# EAGLE board I2C_Breakout_Block-GiantPanel-v10 (EAGLE 6.6.0), part 1 of 11
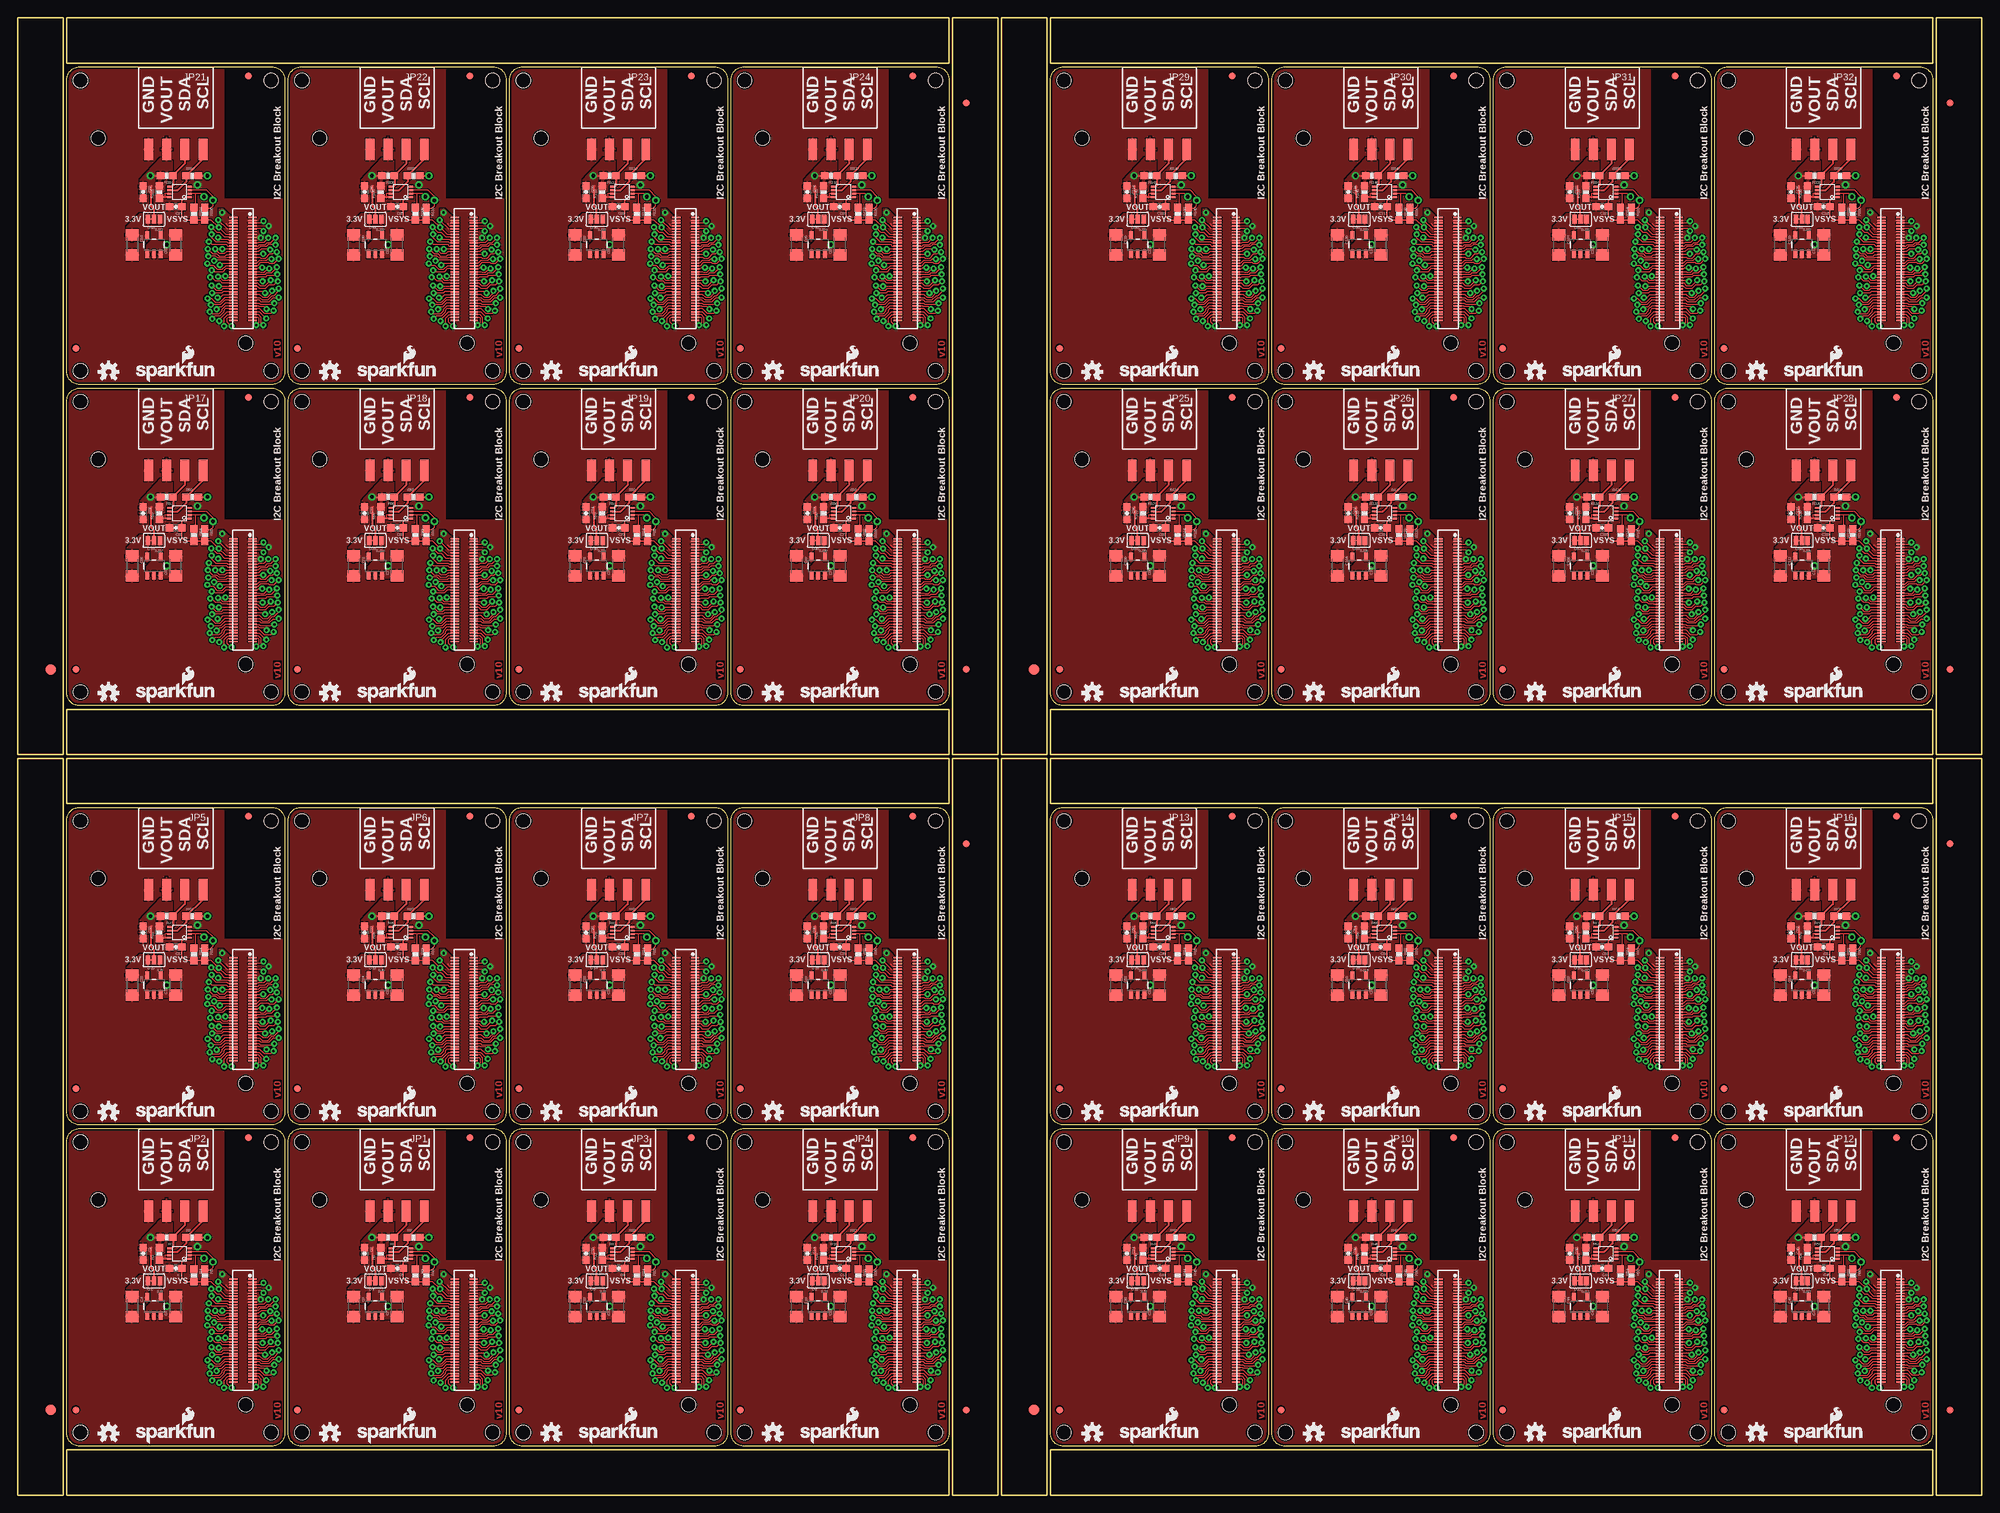
[diagram p0: board, top side]
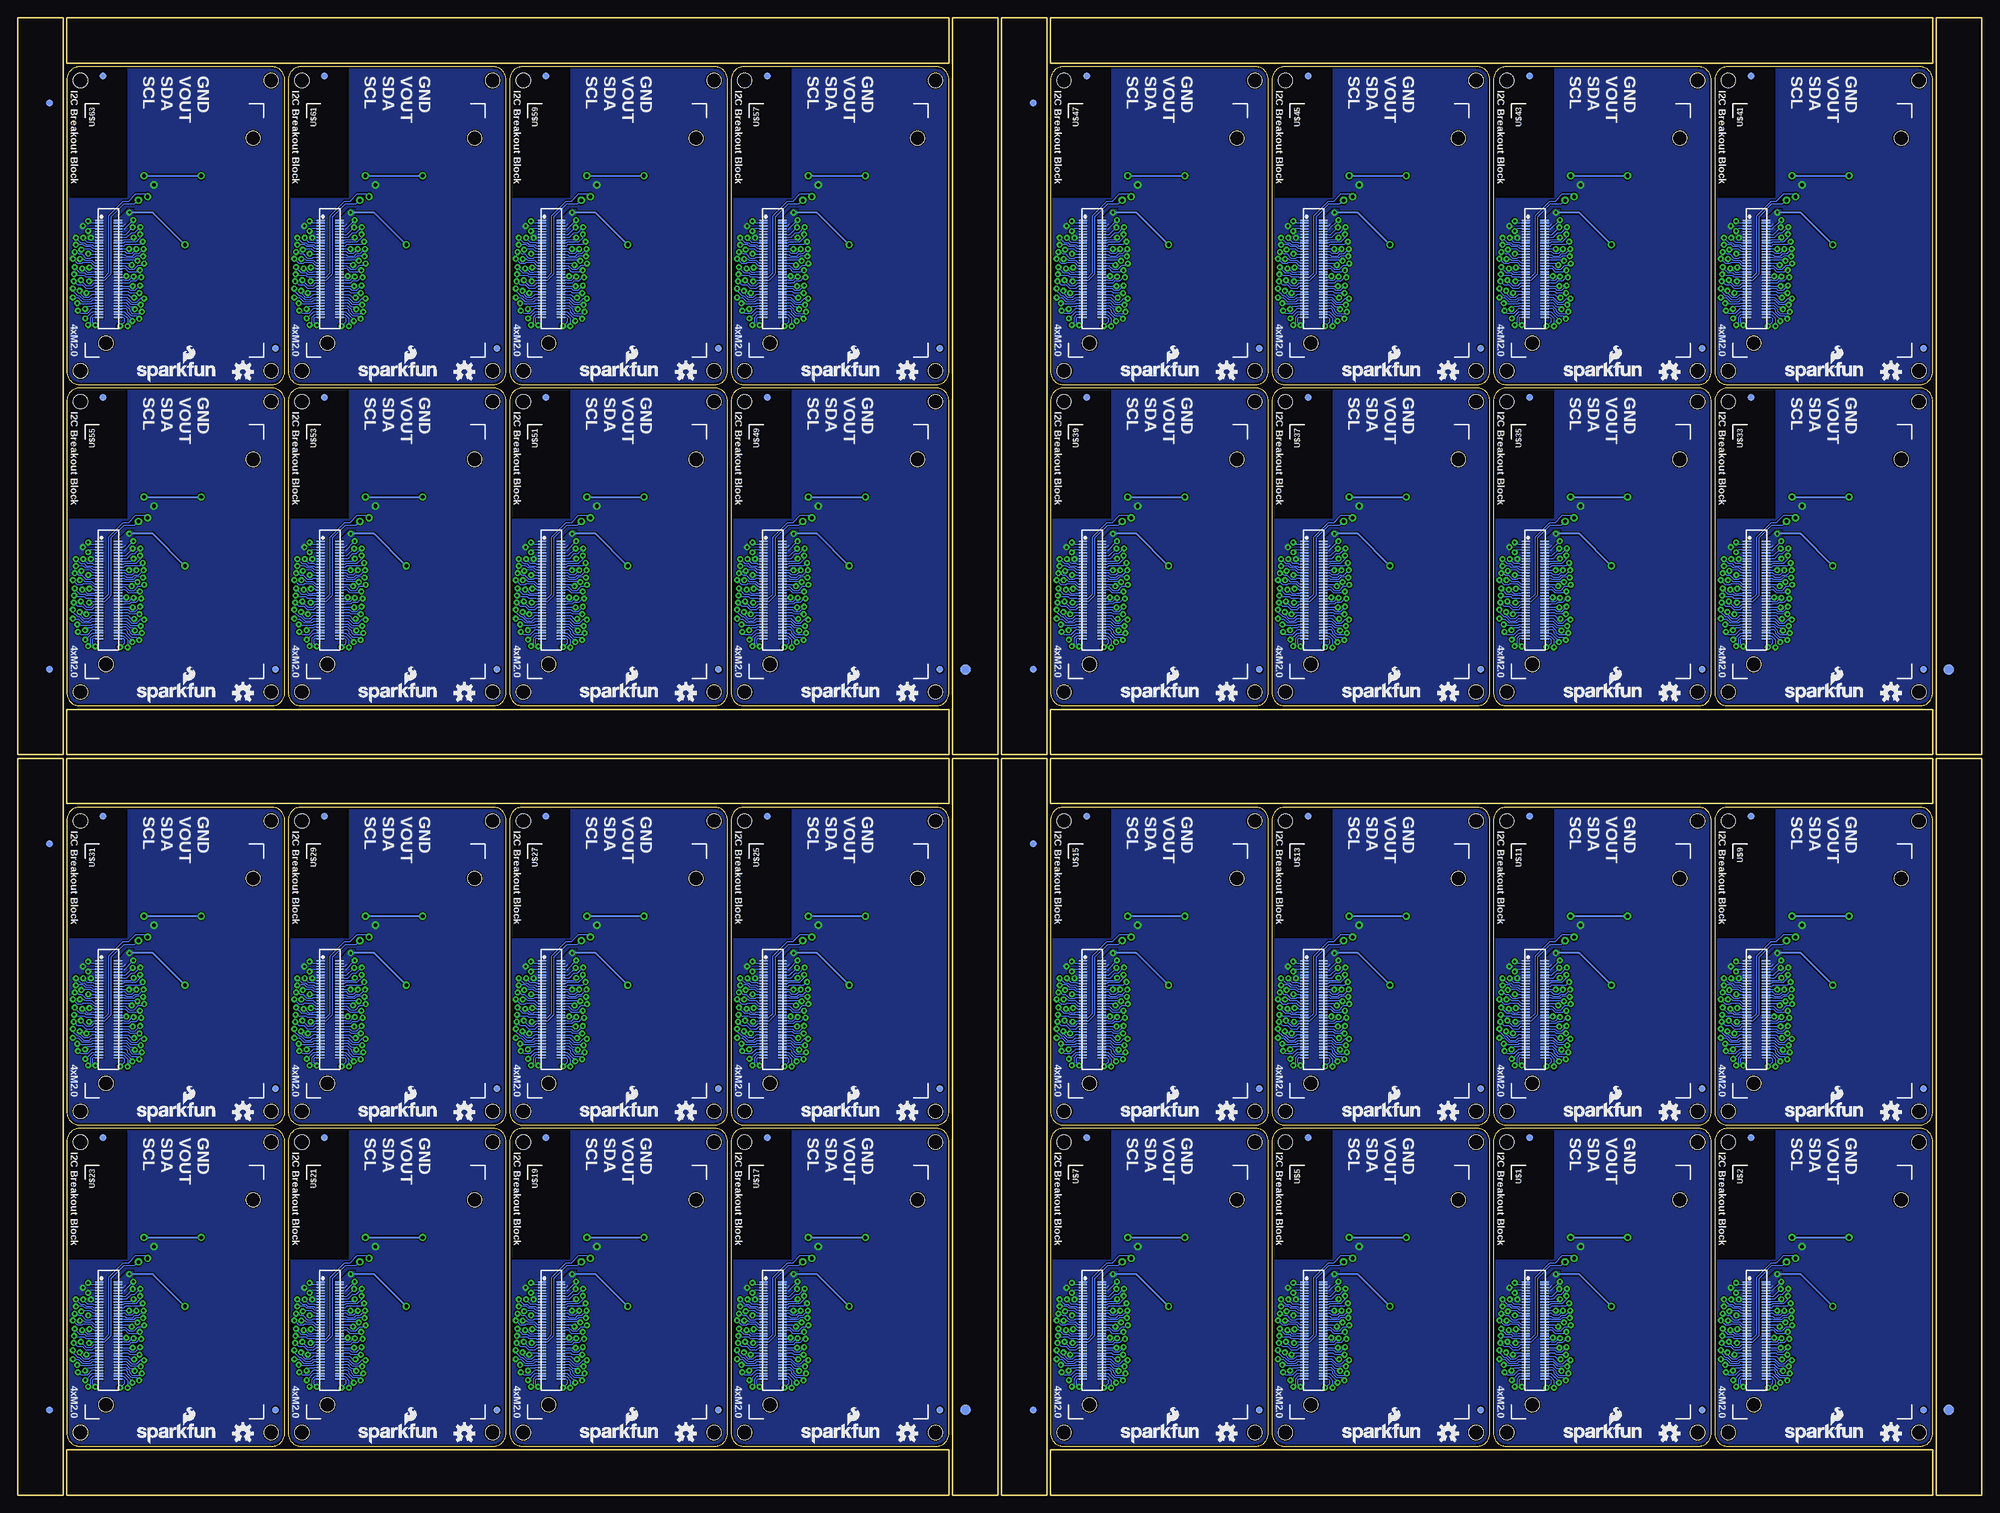
[diagram p1: board, bottom side, seen from below]

Size 274.83 x 206.76 mm. Coordinates in mm from the lower left corner, seen from the top.
Outline: 336 segments
Copper layers (1*16): Top 0.035mm / dielectric 1.5mm / Bottom 0.035mm
Design rules "SparkFun-2-layer *": minimum track width 6mil, minimum drill 13mil, track to track 6mil, track to pad 6mil, pad to pad 6mil, via to via 6mil, smd to smd 6mil, copper to edge 8mil, drill to drill 8mil, minimum pad ring 12mil, minimum via ring 10mil, stop-mask expansion 4mil, vias tented up to drill 20mil, thermal gap 6mil
Holes 2 mm at 35.43,8.76 8.76,8.76 8.76,49.4 35.43,49.4 66.42,8.76 39.75,8.76 39.75,49.4 66.42,49.4 97.41,8.76 70.74,8.76 70.74,49.4 97.41,49.4 128.4,8.76 101.73,8.76 101.73,49.4 128.4,49.4 35.43,53.72 8.76,53.72 8.76,94.36 35.43,94.36 66.42,53.72 39.75,53.72 39.75,94.36 66.42,94.36 97.41,53.72 70.74,53.72 70.74,94.36 97.41,94.36 128.4,53.72 101.73,53.72 101.73,94.36 128.4,94.36 173.1,8.76 146.43,8.76 146.43,49.4 173.1,49.4 204.09,8.76 177.42,8.76 177.42,49.4 204.09,49.4 235.08,8.76 208.41,8.76 208.41,49.4 235.08,49.4 266.06,8.76 239.4,8.76 239.4,49.4 266.06,49.4 173.1,53.72 146.43,53.72 146.43,94.36 173.1,94.36 204.09,53.72 177.42,53.72 177.42,94.36 204.09,94.36 235.08,53.72 208.41,53.72 208.41,94.36 235.08,94.36 266.06,53.72 239.4,53.72 239.4,94.36 266.06,94.36 35.43,112.39 8.76,112.39 8.76,153.03 35.43,153.03 66.42,112.39 39.75,112.39 39.75,153.03 66.42,153.03 97.41,112.39 70.74,112.39 70.74,153.03 97.41,153.03 128.4,112.39 101.73,112.39 101.73,153.03 128.4,153.03 35.43,157.35 8.76,157.35 8.76,197.99 35.43,197.99 66.42,157.35 39.75,157.35 39.75,197.99 66.42,197.99 97.41,157.35 70.74,157.35 70.74,197.99 97.41,197.99 128.4,157.35 101.73,157.35 101.73,197.99 128.4,197.99 173.1,112.39 146.43,112.39 146.43,153.03 173.1,153.03 204.09,112.39 177.42,112.39 177.42,153.03 204.09,153.03 235.08,112.39 208.41,112.39 208.41,153.03 235.08,153.03 266.06,112.39 239.4,112.39 239.4,153.03 266.06,153.03 173.1,157.35 146.43,157.35 146.43,197.99 173.1,197.99 204.09,157.35 177.42,157.35 177.42,197.99 204.09,197.99 235.08,157.35 208.41,157.35 208.41,197.99 235.08,197.99 266.06,157.35 239.4,157.35 239.4,197.99 266.06,197.99
tRestrict: area 29,33 to 37.3,51.3; area 59.9,33 to 68.3,51.3; area 90.9,33 to 99.3,51.3; area 121.9,33 to 130.3,51.3; area 29,78 to 37.3,96.3; area 59.9,78 to 68.3,96.3; area 90.9,78 to 99.3,96.3; area 121.9,78 to 130.3,96.3; area 166.6,33 to 175,51.3; area 197.6,33 to 206,51.3; area 228.6,33 to 237,51.3; area 259.6,33 to 268,51.3; 20 more areas; 32 lines
bRestrict: area 29,33 to 37.3,51.3; area 59.9,33 to 68.3,51.3; area 90.9,33 to 99.3,51.3; area 121.9,33 to 130.3,51.3; area 29,78 to 37.3,96.3; area 59.9,78 to 68.3,96.3; area 90.9,78 to 99.3,96.3; area 121.9,78 to 130.3,96.3; area 166.6,33 to 175,51.3; area 197.6,33 to 206,51.3; area 228.6,33 to 237,51.3; area 259.6,33 to 268,51.3; 20 more areas

## Footprints (pad centres in the part's own frame; a part is rotated, then mirrored left to right if it is on the bottom)
0603-CAP = smd 1.1 x 1: 1 -0.85,0; 2 0.85,0
1206 = smd 1.6 x 1.8: 1 -1.4,0; 2 1.4,0
FIDUCIAL-1.5X3 = smd 1.5 x 1.5: 1 0,0
FIDUCIAL-1X2 = smd 1 x 1: 1 0,0
1X04_SMD_RA_FEMALE = smd 1.25 x 3: 1 -3.81,7.225; 2 -1.27,7.225; 3 1.27,7.225; 4 3.81,7.225
0603-RES = smd 1.1 x 1: 1 -0.85,0; 2 0.85,0
PAD-JUMPER-3-2OF3_NC_BY_TRACE_YES_SILK_FULL_BOX = smd 0.635 x 1.27: 1 -0.813,0; 2 0,0; 3 0.813,0
SOT23-5 = smd 0.55 x 1.2: 1 -0.95,-1.3; 2 0,-1.3; 3 0.95,-1.3; 4 0.95,1.3; 5 -0.95,1.3
PCA9306DC-1:1 = smd 0.25 x 0.602: 1 -0.73,-1.446; 2 -0.23,-1.446; 3 0.27,-1.446; 4 0.77,-1.446; 5 0.77,1.431; 6 0.27,1.431; 7 -0.23,1.431; 8 -0.73,1.431
EDISON_DAUGHTER = smd 1.14 x 0.2: 1 1.98,19.17; 2 4.62,19.17; 3 1.98,18.77; 4 4.62,18.77; 5 1.98,18.37; 6 4.62,18.37; 7 1.98,17.97; 8 4.62,17.97; 9 1.98,17.57; 10 4.62,17.57; 11 1.98,17.17; 12 4.62,17.17; 13 1.98,16.77; 14 4.62,16.77; 15 1.98,16.37; 16 4.62,16.37; 17 1.98,15.97; 18 4.62,15.97; 19 1.98,15.57; 20 4.62,15.57; 21 1.98,15.17; 22 4.62,15.17; 23 1.98,14.77; 24 4.62,14.77; 25 1.98,14.37; 26 4.62,14.37; 27 1.98,13.97; 28 4.62,13.97; 29 1.98,13.57; 30 4.62,13.57; 31 1.98,13.17; 32 4.62,13.17; 33 1.98,12.77; 34 4.62,12.77; 35 1.98,12.37; 36 4.62,12.37; 37 1.98,11.97; 38 4.62,11.97; 39 1.98,11.57; 40 4.62,11.57; 41 1.98,11.17; 42 4.62,11.17; 43 1.98,10.77; 44 4.62,10.77; 45 1.98,10.37; 46 4.62,10.37; 47 1.98,9.97; 48 4.62,9.97; 49 1.98,9.57; 50 4.62,9.57; 51 1.98,9.17; 52 4.62,9.17; 53 1.98,8.77; 54 4.62,8.77; 55 1.98,8.37; 56 4.62,8.37; 57 1.98,7.97; 58 4.62,7.97; 59 1.98,7.57; 60 4.62,7.57; 61 1.98,7.17; 62 4.62,7.17; 63 1.98,6.77; 64 4.62,6.77; 65 1.98,6.37; 66 4.62,6.37; 67 1.98,5.97; 68 4.62,5.97; 69 1.98,5.57; 70 4.62,5.57 | hole 2: 23.53,30.67; 2.93,1.98
DF40C-70DP-0.4(51) = smd 0.2 x 1.14 bottom: 1 6.8,1.32; 2 6.8,-1.32; 3 6.4,1.32; 4 6.4,-1.32; 5 6,1.32; 6 6,-1.32; 7 5.6,1.32; 8 5.6,-1.32; 9 5.2,1.32; 10 5.2,-1.32; 11 4.8,1.32; 12 4.8,-1.32; 13 4.4,1.32; 14 4.4,-1.32; 15 4,1.32; 16 4,-1.32; 17 3.6,1.32; 18 3.6,-1.32; 19 3.2,1.32; 20 3.2,-1.32; 21 2.8,1.32; 22 2.8,-1.32; 23 2.4,1.32; 24 2.4,-1.32; 25 2,1.32; 26 2,-1.32; 27 1.6,1.32; 28 1.6,-1.32; 29 1.2,1.32; 30 1.2,-1.32; 31 0.8,1.32; 32 0.8,-1.32; 33 0.4,1.32; 34 0.4,-1.32; 35 0,1.32; 36 0,-1.32; 37 -0.4,1.32; 38 -0.4,-1.32; 39 -0.8,1.32; 40 -0.8,-1.32; 41 -1.2,1.32; 42 -1.2,-1.32; 43 -1.6,1.32; 44 -1.6,-1.32; 45 -2,1.32; 46 -2,-1.32; 47 -2.4,1.32; 48 -2.4,-1.32; 49 -2.8,1.32; 50 -2.8,-1.32; 51 -3.2,1.32; 52 -3.2,-1.32; 53 -3.6,1.32; 54 -3.6,-1.32; 55 -4,1.32; 56 -4,-1.32; 57 -4.4,1.32; 58 -4.4,-1.32; 59 -4.8,1.32; 60 -4.8,-1.32; 61 -5.2,1.32; 62 -5.2,-1.32; 63 -5.6,1.32; 64 -5.6,-1.32; 65 -6,1.32; 66 -6,-1.32; 67 -6.4,1.32; 68 -6.4,-1.32; 69 -6.8,1.32; 70 -6.8,-1.32; NC1 7.2,1.32; NC2 7.2,-1.32; NC3 -7.2,-1.32; NC4 -7.2,1.32

## Placement (x,y rotation side)
C1  0.1uF  [0603-CAP]  22.1,31.75 180 top
C2  0.1uF  [0603-CAP]  17.53,33.78 270 top
C3  10uF  [1206]  22.1,26.42 90 top
C4  10uF  [1206]  16,26.42 270 top
C5  0.1uF  [0603-CAP]  53.09,31.75 180 top
C6  0.1uF  [0603-CAP]  48.51,33.78 270 top
C7  10uF  [1206]  53.09,26.42 90 top
C8  10uF  [1206]  46.99,26.42 270 top
C9  0.1uF  [0603-CAP]  84.07,31.75 180 top
C10  0.1uF  [0603-CAP]  79.5,33.78 270 top
C11  10uF  [1206]  84.07,26.42 90 top
C12  10uF  [1206]  77.98,26.42 270 top
C13  0.1uF  [0603-CAP]  115.06,31.75 180 top
C14  0.1uF  [0603-CAP]  110.49,33.78 270 top
C15  10uF  [1206]  115.06,26.42 90 top
C16  10uF  [1206]  108.97,26.42 270 top
C17  0.1uF  [0603-CAP]  22.1,76.71 180 top
C18  0.1uF  [0603-CAP]  17.53,78.74 270 top
C19  10uF  [1206]  22.1,71.37 90 top
C20  10uF  [1206]  16,71.37 270 top
C21  0.1uF  [0603-CAP]  53.09,76.71 180 top
C22  0.1uF  [0603-CAP]  48.51,78.74 270 top
C23  10uF  [1206]  53.09,71.37 90 top
C24  10uF  [1206]  46.99,71.37 270 top
C25  0.1uF  [0603-CAP]  84.07,76.71 180 top
C26  0.1uF  [0603-CAP]  79.5,78.74 270 top
C27  10uF  [1206]  84.07,71.37 90 top
C28  10uF  [1206]  77.98,71.37 270 top
C29  0.1uF  [0603-CAP]  115.06,76.71 180 top
C30  0.1uF  [0603-CAP]  110.49,78.74 270 top
C31  10uF  [1206]  115.06,71.37 90 top
C32  10uF  [1206]  108.97,71.37 270 top
C33  0.1uF  [0603-CAP]  159.77,31.75 180 top
C34  0.1uF  [0603-CAP]  155.19,33.78 270 top
C35  10uF  [1206]  159.77,26.42 90 top
C36  10uF  [1206]  153.67,26.42 270 top
C37  0.1uF  [0603-CAP]  190.75,31.75 180 top
C38  0.1uF  [0603-CAP]  186.18,33.78 270 top
C39  10uF  [1206]  190.75,26.42 90 top
C40  10uF  [1206]  184.66,26.42 270 top
C41  0.1uF  [0603-CAP]  221.74,31.75 180 top
C42  0.1uF  [0603-CAP]  217.17,33.78 270 top
C43  10uF  [1206]  221.74,26.42 90 top
C44  10uF  [1206]  215.65,26.42 270 top
C45  0.1uF  [0603-CAP]  252.73,31.75 180 top
C46  0.1uF  [0603-CAP]  248.16,33.78 270 top
C47  10uF  [1206]  252.73,26.42 90 top
C48  10uF  [1206]  246.63,26.42 270 top
C49  0.1uF  [0603-CAP]  159.77,76.71 180 top
C50  0.1uF  [0603-CAP]  155.19,78.74 270 top
C51  10uF  [1206]  159.77,71.37 90 top
C52  10uF  [1206]  153.67,71.37 270 top
C53  0.1uF  [0603-CAP]  190.75,76.71 180 top
C54  0.1uF  [0603-CAP]  186.18,78.74 270 top
C55  10uF  [1206]  190.75,71.37 90 top
C56  10uF  [1206]  184.66,71.37 270 top
C57  0.1uF  [0603-CAP]  221.74,76.71 180 top
C58  0.1uF  [0603-CAP]  217.17,78.74 270 top
C59  10uF  [1206]  221.74,71.37 90 top
C60  10uF  [1206]  215.65,71.37 270 top
C61  0.1uF  [0603-CAP]  252.73,76.71 180 top
C62  0.1uF  [0603-CAP]  248.16,78.74 270 top
C63  10uF  [1206]  252.73,71.37 90 top
C64  10uF  [1206]  246.63,71.37 270 top
C65  0.1uF  [0603-CAP]  22.1,135.38 180 top
C66  0.1uF  [0603-CAP]  17.53,137.41 270 top
C67  10uF  [1206]  22.1,130.05 90 top
C68  10uF  [1206]  16,130.05 270 top
C69  0.1uF  [0603-CAP]  53.09,135.38 180 top
C70  0.1uF  [0603-CAP]  48.51,137.41 270 top
C71  10uF  [1206]  53.09,130.05 90 top
C72  10uF  [1206]  46.99,130.05 270 top
C73  0.1uF  [0603-CAP]  84.07,135.38 180 top
C74  0.1uF  [0603-CAP]  79.5,137.41 270 top
C75  10uF  [1206]  84.07,130.05 90 top
C76  10uF  [1206]  77.98,130.05 270 top
C77  0.1uF  [0603-CAP]  115.06,135.38 180 top
C78  0.1uF  [0603-CAP]  110.49,137.41 270 top
C79  10uF  [1206]  115.06,130.05 90 top
C80  10uF  [1206]  108.97,130.05 270 top
C81  0.1uF  [0603-CAP]  22.1,180.34 180 top
C82  0.1uF  [0603-CAP]  17.53,182.37 270 top
C83  10uF  [1206]  22.1,175.01 90 top
C84  10uF  [1206]  16,175.01 270 top
C85  0.1uF  [0603-CAP]  53.09,180.34 180 top
C86  0.1uF  [0603-CAP]  48.51,182.37 270 top
C87  10uF  [1206]  53.09,175.01 90 top
C88  10uF  [1206]  46.99,175.01 270 top
C89  0.1uF  [0603-CAP]  84.07,180.34 180 top
C90  0.1uF  [0603-CAP]  79.5,182.37 270 top
C91  10uF  [1206]  84.07,175.01 90 top
C92  10uF  [1206]  77.98,175.01 270 top
C93  0.1uF  [0603-CAP]  115.06,180.34 180 top
C94  0.1uF  [0603-CAP]  110.49,182.37 270 top
C95  10uF  [1206]  115.06,175.01 90 top
C96  10uF  [1206]  108.97,175.01 270 top
C97  0.1uF  [0603-CAP]  159.77,135.38 180 top
C98  0.1uF  [0603-CAP]  155.19,137.41 270 top
C99  10uF  [1206]  159.77,130.05 90 top
C100  10uF  [1206]  153.67,130.05 270 top
C101  0.1uF  [0603-CAP]  190.75,135.38 180 top
C102  0.1uF  [0603-CAP]  186.18,137.41 270 top
C103  10uF  [1206]  190.75,130.05 90 top
C104  10uF  [1206]  184.66,130.05 270 top
C105  0.1uF  [0603-CAP]  221.74,135.38 180 top
C106  0.1uF  [0603-CAP]  217.17,137.41 270 top
C107  10uF  [1206]  221.74,130.05 90 top
C108  10uF  [1206]  215.65,130.05 270 top
C109  0.1uF  [0603-CAP]  252.73,135.38 180 top
C110  0.1uF  [0603-CAP]  248.16,137.41 270 top
C111  10uF  [1206]  252.73,130.05 90 top
C112  10uF  [1206]  246.63,130.05 270 top
C113  0.1uF  [0603-CAP]  159.77,180.34 180 top
C114  0.1uF  [0603-CAP]  155.19,182.37 270 top
C115  10uF  [1206]  159.77,175.01 90 top
C116  10uF  [1206]  153.67,175.01 270 top
C117  0.1uF  [0603-CAP]  190.75,180.34 180 top
C118  0.1uF  [0603-CAP]  186.18,182.37 270 top
C119  10uF  [1206]  190.75,175.01 90 top
C120  10uF  [1206]  184.66,175.01 270 top
C121  0.1uF  [0603-CAP]  221.74,180.34 180 top
C122  0.1uF  [0603-CAP]  217.17,182.37 270 top
C123  10uF  [1206]  221.74,175.01 90 top
C124  10uF  [1206]  215.65,175.01 270 top
C125  0.1uF  [0603-CAP]  252.73,180.34 180 top
C126  0.1uF  [0603-CAP]  248.16,182.37 270 top
C127  10uF  [1206]  252.73,175.01 90 top
C128  10uF  [1206]  246.63,175.01 270 top
E$1  [FIDUCIAL-1.5X3]  4.57,11.94 0 top
E$2  [FIDUCIAL-1.5X3]  4.57,11.94 0 bottom
E$3  [FIDUCIAL-1X2]  132.72,91.19 180 bottom
E$4  [FIDUCIAL-1X2]  132.72,11.94 0 top
E$5  [FIDUCIAL-1X2]  132.72,91.19 180 top
E$6  [FIDUCIAL-1X2]  132.72,11.94 0 bottom
E$7  [FIDUCIAL-1X2]  270.38,11.94 0 top
E$8  [FIDUCIAL-1X2]  270.38,91.19 180 top
E$9  [FIDUCIAL-1.5X3]  142.24,11.94 0 top
E$10  [FIDUCIAL-1.5X3]  142.24,11.94 0 bottom
E$11  [FIDUCIAL-1X2]  270.38,91.19 180 bottom
E$12  [FIDUCIAL-1X2]  270.38,11.94 0 bottom
E$13  [FIDUCIAL-1X2]  132.72,115.57 0 top
E$14  [FIDUCIAL-1X2]  132.72,194.82 180 top
E$15  [FIDUCIAL-1.5X3]  4.57,115.57 0 top
E$16  [FIDUCIAL-1.5X3]  4.57,115.57 0 bottom
E$17  [FIDUCIAL-1X2]  132.72,194.82 180 bottom
E$18  [FIDUCIAL-1X2]  132.72,115.57 0 bottom
E$19  [FIDUCIAL-1X2]  270.38,115.57 0 top
E$20  [FIDUCIAL-1X2]  270.38,194.82 180 top
E$21  [FIDUCIAL-1.5X3]  142.24,115.57 0 top
E$22  [FIDUCIAL-1.5X3]  142.24,115.57 0 bottom
E$23  [FIDUCIAL-1X2]  270.38,194.82 180 bottom
E$24  [FIDUCIAL-1X2]  270.38,115.57 0 bottom
FID1  FIDUCIAL1X2  [FIDUCIAL-1X2]  32.26,50.04 0 bottom
FID2  FIDUCIAL1X2  [FIDUCIAL-1X2]  32.26,50.04 0 top
FID3  FIDUCIAL1X2  [FIDUCIAL-1X2]  8.13,11.94 0 bottom
FID4  FIDUCIAL1X2  [FIDUCIAL-1X2]  8.13,11.94 0 top
FID5  FIDUCIAL1X2  [FIDUCIAL-1X2]  63.25,50.04 0 bottom
FID6  FIDUCIAL1X2  [FIDUCIAL-1X2]  63.25,50.04 0 top
FID7  FIDUCIAL1X2  [FIDUCIAL-1X2]  39.12,11.94 0 bottom
FID8  FIDUCIAL1X2  [FIDUCIAL-1X2]  39.12,11.94 0 top
FID9  FIDUCIAL1X2  [FIDUCIAL-1X2]  94.23,50.04 0 bottom
FID10  FIDUCIAL1X2  [FIDUCIAL-1X2]  94.23,50.04 0 top
FID11  FIDUCIAL1X2  [FIDUCIAL-1X2]  70.1,11.94 0 bottom
FID12  FIDUCIAL1X2  [FIDUCIAL-1X2]  70.1,11.94 0 top
FID13  FIDUCIAL1X2  [FIDUCIAL-1X2]  125.22,50.04 0 bottom
FID14  FIDUCIAL1X2  [FIDUCIAL-1X2]  125.22,50.04 0 top
FID15  FIDUCIAL1X2  [FIDUCIAL-1X2]  101.09,11.94 0 bottom
FID16  FIDUCIAL1X2  [FIDUCIAL-1X2]  101.09,11.94 0 top
FID17  FIDUCIAL1X2  [FIDUCIAL-1X2]  32.26,95 0 bottom
FID18  FIDUCIAL1X2  [FIDUCIAL-1X2]  32.26,95 0 top
FID19  FIDUCIAL1X2  [FIDUCIAL-1X2]  8.13,56.9 0 bottom
FID20  FIDUCIAL1X2  [FIDUCIAL-1X2]  8.13,56.9 0 top
FID21  FIDUCIAL1X2  [FIDUCIAL-1X2]  63.25,95 0 bottom
FID22  FIDUCIAL1X2  [FIDUCIAL-1X2]  63.25,95 0 top
FID23  FIDUCIAL1X2  [FIDUCIAL-1X2]  39.12,56.9 0 bottom
FID24  FIDUCIAL1X2  [FIDUCIAL-1X2]  39.12,56.9 0 top
FID25  FIDUCIAL1X2  [FIDUCIAL-1X2]  94.23,95 0 bottom
FID26  FIDUCIAL1X2  [FIDUCIAL-1X2]  94.23,95 0 top
FID27  FIDUCIAL1X2  [FIDUCIAL-1X2]  70.1,56.9 0 bottom
FID28  FIDUCIAL1X2  [FIDUCIAL-1X2]  70.1,56.9 0 top
FID29  FIDUCIAL1X2  [FIDUCIAL-1X2]  125.22,95 0 bottom
FID30  FIDUCIAL1X2  [FIDUCIAL-1X2]  125.22,95 0 top
FID31  FIDUCIAL1X2  [FIDUCIAL-1X2]  101.09,56.9 0 bottom
FID32  FIDUCIAL1X2  [FIDUCIAL-1X2]  101.09,56.9 0 top
FID33  FIDUCIAL1X2  [FIDUCIAL-1X2]  169.93,50.04 0 bottom
FID34  FIDUCIAL1X2  [FIDUCIAL-1X2]  169.93,50.04 0 top
FID35  FIDUCIAL1X2  [FIDUCIAL-1X2]  145.8,11.94 0 bottom
FID36  FIDUCIAL1X2  [FIDUCIAL-1X2]  145.8,11.94 0 top
FID37  FIDUCIAL1X2  [FIDUCIAL-1X2]  200.91,50.04 0 bottom
FID38  FIDUCIAL1X2  [FIDUCIAL-1X2]  200.91,50.04 0 top
FID39  FIDUCIAL1X2  [FIDUCIAL-1X2]  176.78,11.94 0 bottom
FID40  FIDUCIAL1X2  [FIDUCIAL-1X2]  176.78,11.94 0 top
FID41  FIDUCIAL1X2  [FIDUCIAL-1X2]  231.9,50.04 0 bottom
FID42  FIDUCIAL1X2  [FIDUCIAL-1X2]  231.9,50.04 0 top
FID43  FIDUCIAL1X2  [FIDUCIAL-1X2]  207.77,11.94 0 bottom
FID44  FIDUCIAL1X2  [FIDUCIAL-1X2]  207.77,11.94 0 top
FID45  FIDUCIAL1X2  [FIDUCIAL-1X2]  262.89,50.04 0 bottom
FID46  FIDUCIAL1X2  [FIDUCIAL-1X2]  262.89,50.04 0 top
FID47  FIDUCIAL1X2  [FIDUCIAL-1X2]  238.76,11.94 0 bottom
FID48  FIDUCIAL1X2  [FIDUCIAL-1X2]  238.76,11.94 0 top
FID49  FIDUCIAL1X2  [FIDUCIAL-1X2]  169.93,95 0 bottom
FID50  FIDUCIAL1X2  [FIDUCIAL-1X2]  169.93,95 0 top
FID51  FIDUCIAL1X2  [FIDUCIAL-1X2]  145.8,56.9 0 bottom
FID52  FIDUCIAL1X2  [FIDUCIAL-1X2]  145.8,56.9 0 top
FID53  FIDUCIAL1X2  [FIDUCIAL-1X2]  200.91,95 0 bottom
FID54  FIDUCIAL1X2  [FIDUCIAL-1X2]  200.91,95 0 top
FID55  FIDUCIAL1X2  [FIDUCIAL-1X2]  176.78,56.9 0 bottom
FID56  FIDUCIAL1X2  [FIDUCIAL-1X2]  176.78,56.9 0 top
FID57  FIDUCIAL1X2  [FIDUCIAL-1X2]  231.9,95 0 bottom
FID58  FIDUCIAL1X2  [FIDUCIAL-1X2]  231.9,95 0 top
FID59  FIDUCIAL1X2  [FIDUCIAL-1X2]  207.77,56.9 0 bottom
FID60  FIDUCIAL1X2  [FIDUCIAL-1X2]  207.77,56.9 0 top
FID61  FIDUCIAL1X2  [FIDUCIAL-1X2]  262.89,95 0 bottom
FID62  FIDUCIAL1X2  [FIDUCIAL-1X2]  262.89,95 0 top
FID63  FIDUCIAL1X2  [FIDUCIAL-1X2]  238.76,56.9 0 bottom
FID64  FIDUCIAL1X2  [FIDUCIAL-1X2]  238.76,56.9 0 top
FID65  FIDUCIAL1X2  [FIDUCIAL-1X2]  32.26,153.67 0 bottom
FID66  FIDUCIAL1X2  [FIDUCIAL-1X2]  32.26,153.67 0 top
FID67  FIDUCIAL1X2  [FIDUCIAL-1X2]  8.13,115.57 0 bottom
FID68  FIDUCIAL1X2  [FIDUCIAL-1X2]  8.13,115.57 0 top
FID69  FIDUCIAL1X2  [FIDUCIAL-1X2]  63.25,153.67 0 bottom
FID70  FIDUCIAL1X2  [FIDUCIAL-1X2]  63.25,153.67 0 top
FID71  FIDUCIAL1X2  [FIDUCIAL-1X2]  39.12,115.57 0 bottom
FID72  FIDUCIAL1X2  [FIDUCIAL-1X2]  39.12,115.57 0 top
FID73  FIDUCIAL1X2  [FIDUCIAL-1X2]  94.23,153.67 0 bottom
FID74  FIDUCIAL1X2  [FIDUCIAL-1X2]  94.23,153.67 0 top
FID75  FIDUCIAL1X2  [FIDUCIAL-1X2]  70.1,115.57 0 bottom
FID76  FIDUCIAL1X2  [FIDUCIAL-1X2]  70.1,115.57 0 top
FID77  FIDUCIAL1X2  [FIDUCIAL-1X2]  125.22,153.67 0 bottom
FID78  FIDUCIAL1X2  [FIDUCIAL-1X2]  125.22,153.67 0 top
FID79  FIDUCIAL1X2  [FIDUCIAL-1X2]  101.09,115.57 0 bottom
FID80  FIDUCIAL1X2  [FIDUCIAL-1X2]  101.09,115.57 0 top
FID81  FIDUCIAL1X2  [FIDUCIAL-1X2]  32.26,198.63 0 bottom
FID82  FIDUCIAL1X2  [FIDUCIAL-1X2]  32.26,198.63 0 top
FID83  FIDUCIAL1X2  [FIDUCIAL-1X2]  8.13,160.53 0 bottom
FID84  FIDUCIAL1X2  [FIDUCIAL-1X2]  8.13,160.53 0 top
FID85  FIDUCIAL1X2  [FIDUCIAL-1X2]  63.25,198.63 0 bottom
FID86  FIDUCIAL1X2  [FIDUCIAL-1X2]  63.25,198.63 0 top
FID87  FIDUCIAL1X2  [FIDUCIAL-1X2]  39.12,160.53 0 bottom
FID88  FIDUCIAL1X2  [FIDUCIAL-1X2]  39.12,160.53 0 top
FID89  FIDUCIAL1X2  [FIDUCIAL-1X2]  94.23,198.63 0 bottom
FID90  FIDUCIAL1X2  [FIDUCIAL-1X2]  94.23,198.63 0 top
FID91  FIDUCIAL1X2  [FIDUCIAL-1X2]  70.1,160.53 0 bottom
FID92  FIDUCIAL1X2  [FIDUCIAL-1X2]  70.1,160.53 0 top
FID93  FIDUCIAL1X2  [FIDUCIAL-1X2]  125.22,198.63 0 bottom
FID94  FIDUCIAL1X2  [FIDUCIAL-1X2]  125.22,198.63 0 top
FID95  FIDUCIAL1X2  [FIDUCIAL-1X2]  101.09,160.53 0 bottom
FID96  FIDUCIAL1X2  [FIDUCIAL-1X2]  101.09,160.53 0 top
FID97  FIDUCIAL1X2  [FIDUCIAL-1X2]  169.93,153.67 0 bottom
FID98  FIDUCIAL1X2  [FIDUCIAL-1X2]  169.93,153.67 0 top
FID99  FIDUCIAL1X2  [FIDUCIAL-1X2]  145.8,115.57 0 bottom
FID100  FIDUCIAL1X2  [FIDUCIAL-1X2]  145.8,115.57 0 top
FID101  FIDUCIAL1X2  [FIDUCIAL-1X2]  200.91,153.67 0 bottom
FID102  FIDUCIAL1X2  [FIDUCIAL-1X2]  200.91,153.67 0 top
FID103  FIDUCIAL1X2  [FIDUCIAL-1X2]  176.78,115.57 0 bottom
FID104  FIDUCIAL1X2  [FIDUCIAL-1X2]  176.78,115.57 0 top
FID105  FIDUCIAL1X2  [FIDUCIAL-1X2]  231.9,153.67 0 bottom
FID106  FIDUCIAL1X2  [FIDUCIAL-1X2]  231.9,153.67 0 top
FID107  FIDUCIAL1X2  [FIDUCIAL-1X2]  207.77,115.57 0 bottom
FID108  FIDUCIAL1X2  [FIDUCIAL-1X2]  207.77,115.57 0 top
FID109  FIDUCIAL1X2  [FIDUCIAL-1X2]  262.89,153.67 0 bottom
FID110  FIDUCIAL1X2  [FIDUCIAL-1X2]  262.89,153.67 0 top
FID111  FIDUCIAL1X2  [FIDUCIAL-1X2]  238.76,115.57 0 bottom
FID112  FIDUCIAL1X2  [FIDUCIAL-1X2]  238.76,115.57 0 top
FID113  FIDUCIAL1X2  [FIDUCIAL-1X2]  169.93,198.63 0 bottom
FID114  FIDUCIAL1X2  [FIDUCIAL-1X2]  169.93,198.63 0 top
FID115  FIDUCIAL1X2  [FIDUCIAL-1X2]  145.8,160.53 0 bottom
FID116  FIDUCIAL1X2  [FIDUCIAL-1X2]  145.8,160.53 0 top
FID117  FIDUCIAL1X2  [FIDUCIAL-1X2]  200.91,198.63 0 bottom
FID118  FIDUCIAL1X2  [FIDUCIAL-1X2]  200.91,198.63 0 top
FID119  FIDUCIAL1X2  [FIDUCIAL-1X2]  176.78,160.53 0 bottom
FID120  FIDUCIAL1X2  [FIDUCIAL-1X2]  176.78,160.53 0 top
FID121  FIDUCIAL1X2  [FIDUCIAL-1X2]  231.9,198.63 0 bottom
FID122  FIDUCIAL1X2  [FIDUCIAL-1X2]  231.9,198.63 0 top
FID123  FIDUCIAL1X2  [FIDUCIAL-1X2]  207.77,160.53 0 bottom
FID124  FIDUCIAL1X2  [FIDUCIAL-1X2]  207.77,160.53 0 top
FID125  FIDUCIAL1X2  [FIDUCIAL-1X2]  262.89,198.63 0 bottom
FID126  FIDUCIAL1X2  [FIDUCIAL-1X2]  262.89,198.63 0 top
FID127  FIDUCIAL1X2  [FIDUCIAL-1X2]  238.76,160.53 0 bottom
FID128  FIDUCIAL1X2  [FIDUCIAL-1X2]  238.76,160.53 0 top
JP1  [1X04_SMD_RA_FEMALE]  53.09,46.99 180 top
JP2  [1X04_SMD_RA_FEMALE]  22.1,46.99 180 top
JP3  [1X04_SMD_RA_FEMALE]  84.07,46.99 180 top
JP4  [1X04_SMD_RA_FEMALE]  115.06,46.99 180 top
JP5  [1X04_SMD_RA_FEMALE]  22.1,91.95 180 top
JP6  [1X04_SMD_RA_FEMALE]  53.09,91.95 180 top
JP7  [1X04_SMD_RA_FEMALE]  84.07,91.95 180 top
JP8  [1X04_SMD_RA_FEMALE]  115.06,91.95 180 top
JP9  [1X04_SMD_RA_FEMALE]  159.77,46.99 180 top
JP10  [1X04_SMD_RA_FEMALE]  190.75,46.99 180 top
JP11  [1X04_SMD_RA_FEMALE]  221.74,46.99 180 top
JP12  [1X04_SMD_RA_FEMALE]  252.73,46.99 180 top
JP13  [1X04_SMD_RA_FEMALE]  159.77,91.95 180 top
JP14  [1X04_SMD_RA_FEMALE]  190.75,91.95 180 top
JP15  [1X04_SMD_RA_FEMALE]  221.74,91.95 180 top
JP16  [1X04_SMD_RA_FEMALE]  252.73,91.95 180 top
JP17  [1X04_SMD_RA_FEMALE]  22.1,150.62 180 top
JP18  [1X04_SMD_RA_FEMALE]  53.09,150.62 180 top
JP19  [1X04_SMD_RA_FEMALE]  84.07,150.62 180 top
JP20  [1X04_SMD_RA_FEMALE]  115.06,150.62 180 top
JP21  [1X04_SMD_RA_FEMALE]  22.1,195.58 180 top
JP22  [1X04_SMD_RA_FEMALE]  53.09,195.58 180 top
JP23  [1X04_SMD_RA_FEMALE]  84.07,195.58 180 top
JP24  [1X04_SMD_RA_FEMALE]  115.06,195.58 180 top
JP25  [1X04_SMD_RA_FEMALE]  159.77,150.62 180 top
JP26  [1X04_SMD_RA_FEMALE]  190.75,150.62 180 top
JP27  [1X04_SMD_RA_FEMALE]  221.74,150.62 180 top
JP28  [1X04_SMD_RA_FEMALE]  252.73,150.62 180 top
JP29  [1X04_SMD_RA_FEMALE]  159.77,195.58 180 top
JP30  [1X04_SMD_RA_FEMALE]  190.75,195.58 180 top
JP31  [1X04_SMD_RA_FEMALE]  221.74,195.58 180 top
JP32  [1X04_SMD_RA_FEMALE]  252.73,195.58 180 top
LOGO1  SFE_LOGO_NAME_FLAME.1_INCH  [SFE_LOGO_NAME_FLAME_.1]  16.13,7.11 0 top
LOGO2  OSHW-LOGOS  [OSHW-LOGO-S]  12.7,8.64 0 bottom
LOGO3  SFE_LOGO_NAME_FLAME.1_INCH  [SFE_LOGO_NAME_FLAME_.1]  27.94,7.11 0 bottom
LOGO4  OSHW-LOGOS  [OSHW-LOGO-S]  12.7,8.64 0 top
LOGO5  OSHW-LOGOS  [OSHW-LOGO-S]  43.69,8.64 0 bottom
LOGO6  SFE_LOGO_NAME_FLAME.1_INCH  [SFE_LOGO_NAME_FLAME_.1]  58.93,7.11 0 bottom
LOGO7  SFE_LOGO_NAME_FLAME.1_INCH  [SFE_LOGO_NAME_FLAME_.1]  47.12,7.11 0 top
LOGO8  OSHW-LOGOS  [OSHW-LOGO-S]  43.69,8.64 0 top
LOGO9  OSHW-LOGOS  [OSHW-LOGO-S]  74.68,8.64 0 bottom
LOGO10  SFE_LOGO_NAME_FLAME.1_INCH  [SFE_LOGO_NAME_FLAME_.1]  89.92,7.11 0 bottom
LOGO11  SFE_LOGO_NAME_FLAME.1_INCH  [SFE_LOGO_NAME_FLAME_.1]  78.11,7.11 0 top
LOGO12  OSHW-LOGOS  [OSHW-LOGO-S]  74.68,8.64 0 top
LOGO13  OSHW-LOGOS  [OSHW-LOGO-S]  105.66,8.64 0 bottom
LOGO14  SFE_LOGO_NAME_FLAME.1_INCH  [SFE_LOGO_NAME_FLAME_.1]  120.9,7.11 0 bottom
LOGO15  SFE_LOGO_NAME_FLAME.1_INCH  [SFE_LOGO_NAME_FLAME_.1]  109.09,7.11 0 top
LOGO16  OSHW-LOGOS  [OSHW-LOGO-S]  105.66,8.64 0 top
LOGO17  OSHW-LOGOS  [OSHW-LOGO-S]  12.7,53.59 0 bottom
LOGO18  SFE_LOGO_NAME_FLAME.1_INCH  [SFE_LOGO_NAME_FLAME_.1]  27.94,52.07 0 bottom
LOGO19  SFE_LOGO_NAME_FLAME.1_INCH  [SFE_LOGO_NAME_FLAME_.1]  16.13,52.07 0 top
LOGO20  OSHW-LOGOS  [OSHW-LOGO-S]  12.7,53.59 0 top
LOGO21  OSHW-LOGOS  [OSHW-LOGO-S]  43.69,53.59 0 bottom
LOGO22  SFE_LOGO_NAME_FLAME.1_INCH  [SFE_LOGO_NAME_FLAME_.1]  58.93,52.07 0 bottom
LOGO23  SFE_LOGO_NAME_FLAME.1_INCH  [SFE_LOGO_NAME_FLAME_.1]  47.12,52.07 0 top
LOGO24  OSHW-LOGOS  [OSHW-LOGO-S]  43.69,53.59 0 top
LOGO25  OSHW-LOGOS  [OSHW-LOGO-S]  74.68,53.59 0 bottom
LOGO26  SFE_LOGO_NAME_FLAME.1_INCH  [SFE_LOGO_NAME_FLAME_.1]  89.92,52.07 0 bottom
LOGO27  SFE_LOGO_NAME_FLAME.1_INCH  [SFE_LOGO_NAME_FLAME_.1]  78.11,52.07 0 top
LOGO28  OSHW-LOGOS  [OSHW-LOGO-S]  74.68,53.59 0 top
LOGO29  OSHW-LOGOS  [OSHW-LOGO-S]  105.66,53.59 0 bottom
LOGO30  SFE_LOGO_NAME_FLAME.1_INCH  [SFE_LOGO_NAME_FLAME_.1]  120.9,52.07 0 bottom
LOGO31  SFE_LOGO_NAME_FLAME.1_INCH  [SFE_LOGO_NAME_FLAME_.1]  109.09,52.07 0 top
LOGO32  OSHW-LOGOS  [OSHW-LOGO-S]  105.66,53.59 0 top
LOGO33  OSHW-LOGOS  [OSHW-LOGO-S]  150.37,8.64 0 bottom
LOGO34  SFE_LOGO_NAME_FLAME.1_INCH  [SFE_LOGO_NAME_FLAME_.1]  165.61,7.11 0 bottom
LOGO35  SFE_LOGO_NAME_FLAME.1_INCH  [SFE_LOGO_NAME_FLAME_.1]  153.8,7.11 0 top
LOGO36  OSHW-LOGOS  [OSHW-LOGO-S]  150.37,8.64 0 top
LOGO37  OSHW-LOGOS  [OSHW-LOGO-S]  181.36,8.64 0 bottom
LOGO38  SFE_LOGO_NAME_FLAME.1_INCH  [SFE_LOGO_NAME_FLAME_.1]  196.6,7.11 0 bottom
LOGO39  SFE_LOGO_NAME_FLAME.1_INCH  [SFE_LOGO_NAME_FLAME_.1]  184.78,7.11 0 top
LOGO40  OSHW-LOGOS  [OSHW-LOGO-S]  181.36,8.64 0 top
LOGO41  OSHW-LOGOS  [OSHW-LOGO-S]  212.34,8.64 0 bottom
LOGO42  SFE_LOGO_NAME_FLAME.1_INCH  [SFE_LOGO_NAME_FLAME_.1]  227.58,7.11 0 bottom
LOGO43  SFE_LOGO_NAME_FLAME.1_INCH  [SFE_LOGO_NAME_FLAME_.1]  215.77,7.11 0 top
LOGO44  OSHW-LOGOS  [OSHW-LOGO-S]  212.34,8.64 0 top
LOGO45  OSHW-LOGOS  [OSHW-LOGO-S]  243.33,8.64 0 bottom
LOGO46  SFE_LOGO_NAME_FLAME.1_INCH  [SFE_LOGO_NAME_FLAME_.1]  258.57,7.11 0 bottom
LOGO47  SFE_LOGO_NAME_FLAME.1_INCH  [SFE_LOGO_NAME_FLAME_.1]  246.76,7.11 0 top
LOGO48  OSHW-LOGOS  [OSHW-LOGO-S]  243.33,8.64 0 top
LOGO49  OSHW-LOGOS  [OSHW-LOGO-S]  150.37,53.59 0 bottom
LOGO50  SFE_LOGO_NAME_FLAME.1_INCH  [SFE_LOGO_NAME_FLAME_.1]  165.61,52.07 0 bottom
LOGO51  SFE_LOGO_NAME_FLAME.1_INCH  [SFE_LOGO_NAME_FLAME_.1]  153.8,52.07 0 top
LOGO52  OSHW-LOGOS  [OSHW-LOGO-S]  150.37,53.59 0 top
LOGO53  OSHW-LOGOS  [OSHW-LOGO-S]  181.36,53.59 0 bottom
LOGO54  SFE_LOGO_NAME_FLAME.1_INCH  [SFE_LOGO_NAME_FLAME_.1]  196.6,52.07 0 bottom
LOGO55  SFE_LOGO_NAME_FLAME.1_INCH  [SFE_LOGO_NAME_FLAME_.1]  184.78,52.07 0 top
LOGO56  OSHW-LOGOS  [OSHW-LOGO-S]  181.36,53.59 0 top
LOGO57  OSHW-LOGOS  [OSHW-LOGO-S]  212.34,53.59 0 bottom
LOGO58  SFE_LOGO_NAME_FLAME.1_INCH  [SFE_LOGO_NAME_FLAME_.1]  227.58,52.07 0 bottom
LOGO59  SFE_LOGO_NAME_FLAME.1_INCH  [SFE_LOGO_NAME_FLAME_.1]  215.77,52.07 0 top
LOGO60  OSHW-LOGOS  [OSHW-LOGO-S]  212.34,53.59 0 top
LOGO61  OSHW-LOGOS  [OSHW-LOGO-S]  243.33,53.59 0 bottom
LOGO62  SFE_LOGO_NAME_FLAME.1_INCH  [SFE_LOGO_NAME_FLAME_.1]  258.57,52.07 0 bottom
LOGO63  SFE_LOGO_NAME_FLAME.1_INCH  [SFE_LOGO_NAME_FLAME_.1]  246.76,52.07 0 top
LOGO64  OSHW-LOGOS  [OSHW-LOGO-S]  243.33,53.59 0 top
LOGO65  OSHW-LOGOS  [OSHW-LOGO-S]  12.7,112.27 0 bottom
LOGO66  SFE_LOGO_NAME_FLAME.1_INCH  [SFE_LOGO_NAME_FLAME_.1]  27.94,110.74 0 bottom
LOGO67  SFE_LOGO_NAME_FLAME.1_INCH  [SFE_LOGO_NAME_FLAME_.1]  16.13,110.74 0 top
LOGO68  OSHW-LOGOS  [OSHW-LOGO-S]  12.7,112.27 0 top
LOGO69  OSHW-LOGOS  [OSHW-LOGO-S]  43.69,112.27 0 bottom
LOGO70  SFE_LOGO_NAME_FLAME.1_INCH  [SFE_LOGO_NAME_FLAME_.1]  58.93,110.74 0 bottom
LOGO71  SFE_LOGO_NAME_FLAME.1_INCH  [SFE_LOGO_NAME_FLAME_.1]  47.12,110.74 0 top
LOGO72  OSHW-LOGOS  [OSHW-LOGO-S]  43.69,112.27 0 top
LOGO73  OSHW-LOGOS  [OSHW-LOGO-S]  74.68,112.27 0 bottom
LOGO74  SFE_LOGO_NAME_FLAME.1_INCH  [SFE_LOGO_NAME_FLAME_.1]  89.92,110.74 0 bottom
LOGO75  SFE_LOGO_NAME_FLAME.1_INCH  [SFE_LOGO_NAME_FLAME_.1]  78.11,110.74 0 top
LOGO76  OSHW-LOGOS  [OSHW-LOGO-S]  74.68,112.27 0 top
LOGO77  OSHW-LOGOS  [OSHW-LOGO-S]  105.66,112.27 0 bottom
LOGO78  SFE_LOGO_NAME_FLAME.1_INCH  [SFE_LOGO_NAME_FLAME_.1]  120.9,110.74 0 bottom
LOGO79  SFE_LOGO_NAME_FLAME.1_INCH  [SFE_LOGO_NAME_FLAME_.1]  109.09,110.74 0 top
LOGO80  OSHW-LOGOS  [OSHW-LOGO-S]  105.66,112.27 0 top
LOGO81  OSHW-LOGOS  [OSHW-LOGO-S]  12.7,157.23 0 bottom
LOGO82  SFE_LOGO_NAME_FLAME.1_INCH  [SFE_LOGO_NAME_FLAME_.1]  27.94,155.7 0 bottom
LOGO83  SFE_LOGO_NAME_FLAME.1_INCH  [SFE_LOGO_NAME_FLAME_.1]  16.13,155.7 0 top
LOGO84  OSHW-LOGOS  [OSHW-LOGO-S]  12.7,157.23 0 top
LOGO85  OSHW-LOGOS  [OSHW-LOGO-S]  43.69,157.23 0 bottom
LOGO86  SFE_LOGO_NAME_FLAME.1_INCH  [SFE_LOGO_NAME_FLAME_.1]  58.93,155.7 0 bottom
LOGO87  SFE_LOGO_NAME_FLAME.1_INCH  [SFE_LOGO_NAME_FLAME_.1]  47.12,155.7 0 top
LOGO88  OSHW-LOGOS  [OSHW-LOGO-S]  43.69,157.23 0 top
LOGO89  OSHW-LOGOS  [OSHW-LOGO-S]  74.68,157.23 0 bottom
LOGO90  SFE_LOGO_NAME_FLAME.1_INCH  [SFE_LOGO_NAME_FLAME_.1]  89.92,155.7 0 bottom
LOGO91  SFE_LOGO_NAME_FLAME.1_INCH  [SFE_LOGO_NAME_FLAME_.1]  78.11,155.7 0 top
LOGO92  OSHW-LOGOS  [OSHW-LOGO-S]  74.68,157.23 0 top
LOGO93  OSHW-LOGOS  [OSHW-LOGO-S]  105.66,157.23 0 bottom
LOGO94  SFE_LOGO_NAME_FLAME.1_INCH  [SFE_LOGO_NAME_FLAME_.1]  120.9,155.7 0 bottom
LOGO95  SFE_LOGO_NAME_FLAME.1_INCH  [SFE_LOGO_NAME_FLAME_.1]  109.09,155.7 0 top
LOGO96  OSHW-LOGOS  [OSHW-LOGO-S]  105.66,157.23 0 top
LOGO97  OSHW-LOGOS  [OSHW-LOGO-S]  150.37,112.27 0 bottom
LOGO98  SFE_LOGO_NAME_FLAME.1_INCH  [SFE_LOGO_NAME_FLAME_.1]  165.61,110.74 0 bottom
LOGO99  SFE_LOGO_NAME_FLAME.1_INCH  [SFE_LOGO_NAME_FLAME_.1]  153.8,110.74 0 top
LOGO100  OSHW-LOGOS  [OSHW-LOGO-S]  150.37,112.27 0 top
LOGO101  OSHW-LOGOS  [OSHW-LOGO-S]  181.36,112.27 0 bottom
LOGO102  SFE_LOGO_NAME_FLAME.1_INCH  [SFE_LOGO_NAME_FLAME_.1]  196.6,110.74 0 bottom
LOGO103  SFE_LOGO_NAME_FLAME.1_INCH  [SFE_LOGO_NAME_FLAME_.1]  184.78,110.74 0 top
LOGO104  OSHW-LOGOS  [OSHW-LOGO-S]  181.36,112.27 0 top
LOGO105  OSHW-LOGOS  [OSHW-LOGO-S]  212.34,112.27 0 bottom
LOGO106  SFE_LOGO_NAME_FLAME.1_INCH  [SFE_LOGO_NAME_FLAME_.1]  227.58,110.74 0 bottom
LOGO107  SFE_LOGO_NAME_FLAME.1_INCH  [SFE_LOGO_NAME_FLAME_.1]  215.77,110.74 0 top
LOGO108  OSHW-LOGOS  [OSHW-LOGO-S]  212.34,112.27 0 top
LOGO109  OSHW-LOGOS  [OSHW-LOGO-S]  243.33,112.27 0 bottom
LOGO110  SFE_LOGO_NAME_FLAME.1_INCH  [SFE_LOGO_NAME_FLAME_.1]  258.57,110.74 0 bottom
LOGO111  SFE_LOGO_NAME_FLAME.1_INCH  [SFE_LOGO_NAME_FLAME_.1]  246.76,110.74 0 top
LOGO112  OSHW-LOGOS  [OSHW-LOGO-S]  243.33,112.27 0 top
LOGO113  OSHW-LOGOS  [OSHW-LOGO-S]  150.37,157.23 0 bottom
LOGO114  SFE_LOGO_NAME_FLAME.1_INCH  [SFE_LOGO_NAME_FLAME_.1]  165.61,155.7 0 bottom
LOGO115  SFE_LOGO_NAME_FLAME.1_INCH  [SFE_LOGO_NAME_FLAME_.1]  153.8,155.7 0 top
LOGO116  OSHW-LOGOS  [OSHW-LOGO-S]  150.37,157.23 0 top
LOGO117  OSHW-LOGOS  [OSHW-LOGO-S]  181.36,157.23 0 bottom
LOGO118  SFE_LOGO_NAME_FLAME.1_INCH  [SFE_LOGO_NAME_FLAME_.1]  196.6,155.7 0 bottom
LOGO119  SFE_LOGO_NAME_FLAME.1_INCH  [SFE_LOGO_NAME_FLAME_.1]  184.78,155.7 0 top
LOGO120  OSHW-LOGOS  [OSHW-LOGO-S]  181.36,157.23 0 top
LOGO121  OSHW-LOGOS  [OSHW-LOGO-S]  212.34,157.23 0 bottom
LOGO122  SFE_LOGO_NAME_FLAME.1_INCH  [SFE_LOGO_NAME_FLAME_.1]  227.58,155.7 0 bottom
LOGO123  SFE_LOGO_NAME_FLAME.1_INCH  [SFE_LOGO_NAME_FLAME_.1]  215.77,155.7 0 top
LOGO124  OSHW-LOGOS  [OSHW-LOGO-S]  212.34,157.23 0 top
LOGO125  OSHW-LOGOS  [OSHW-LOGO-S]  243.33,157.23 0 bottom
LOGO126  SFE_LOGO_NAME_FLAME.1_INCH  [SFE_LOGO_NAME_FLAME_.1]  258.57,155.7 0 bottom
LOGO127  SFE_LOGO_NAME_FLAME.1_INCH  [SFE_LOGO_NAME_FLAME_.1]  246.76,155.7 0 top
LOGO128  OSHW-LOGOS  [OSHW-LOGO-S]  243.33,157.23 0 top
R1  10K  [0603-RES]  20.83,36.07 180 top
R2  10K  [0603-RES]  24.38,36.07 0 top
R3  200k  [0603-RES]  19.81,33.78 90 top
R4  DNP  [0603-RES]  24.64,30.73 270 top
R5  DNP  [0603-RES]  26.16,30.73 270 top
R6  10K  [0603-RES]  51.82,36.07 180 top
R7  10K  [0603-RES]  55.37,36.07 0 top
R8  200k  [0603-RES]  50.8,33.78 90 top
R9  DNP  [0603-RES]  55.63,30.73 270 top
R10  DNP  [0603-RES]  57.15,30.73 270 top
R11  10K  [0603-RES]  82.8,36.07 180 top
R12  10K  [0603-RES]  86.36,36.07 0 top
R13  200k  [0603-RES]  81.79,33.78 90 top
R14  DNP  [0603-RES]  86.61,30.73 270 top
R15  DNP  [0603-RES]  88.14,30.73 270 top
R16  10K  [0603-RES]  113.79,36.07 180 top
R17  10K  [0603-RES]  117.35,36.07 0 top
R18  200k  [0603-RES]  112.78,33.78 90 top
R19  DNP  [0603-RES]  117.6,30.73 270 top
R20  DNP  [0603-RES]  119.13,30.73 270 top
R21  10K  [0603-RES]  20.83,81.03 180 top
R22  10K  [0603-RES]  24.38,81.03 0 top
R23  200k  [0603-RES]  19.81,78.74 90 top
R24  DNP  [0603-RES]  24.64,75.69 270 top
R25  DNP  [0603-RES]  26.16,75.69 270 top
R26  10K  [0603-RES]  51.82,81.03 180 top
R27  10K  [0603-RES]  55.37,81.03 0 top
R28  200k  [0603-RES]  50.8,78.74 90 top
R29  DNP  [0603-RES]  55.63,75.69 270 top
R30  DNP  [0603-RES]  57.15,75.69 270 top
R31  10K  [0603-RES]  82.8,81.03 180 top
R32  10K  [0603-RES]  86.36,81.03 0 top
R33  200k  [0603-RES]  81.79,78.74 90 top
R34  DNP  [0603-RES]  86.61,75.69 270 top
R35  DNP  [0603-RES]  88.14,75.69 270 top
R36  10K  [0603-RES]  113.79,81.03 180 top
R37  10K  [0603-RES]  117.35,81.03 0 top
R38  200k  [0603-RES]  112.78,78.74 90 top
R39  DNP  [0603-RES]  117.6,75.69 270 top
R40  DNP  [0603-RES]  119.13,75.69 270 top
R41  10K  [0603-RES]  158.5,36.07 180 top
R42  10K  [0603-RES]  162.05,36.07 0 top
R43  200k  [0603-RES]  157.48,33.78 90 top
R44  DNP  [0603-RES]  162.31,30.73 270 top
R45  DNP  [0603-RES]  163.83,30.73 270 top
R46  10K  [0603-RES]  189.48,36.07 180 top
R47  10K  [0603-RES]  193.04,36.07 0 top
R48  200k  [0603-RES]  188.47,33.78 90 top
R49  DNP  [0603-RES]  193.29,30.73 270 top
R50  DNP  [0603-RES]  194.82,30.73 270 top
R51  10K  [0603-RES]  220.47,36.07 180 top
R52  10K  [0603-RES]  224.03,36.07 0 top
R53  200k  [0603-RES]  219.46,33.78 90 top
R54  DNP  [0603-RES]  224.28,30.73 270 top
R55  DNP  [0603-RES]  225.81,30.73 270 top
R56  10K  [0603-RES]  251.46,36.07 180 top
R57  10K  [0603-RES]  255.02,36.07 0 top
R58  200k  [0603-RES]  250.44,33.78 90 top
R59  DNP  [0603-RES]  255.27,30.73 270 top
R60  DNP  [0603-RES]  256.79,30.73 270 top
R61  10K  [0603-RES]  158.5,81.03 180 top
R62  10K  [0603-RES]  162.05,81.03 0 top
R63  200k  [0603-RES]  157.48,78.74 90 top
R64  DNP  [0603-RES]  162.31,75.69 270 top
R65  DNP  [0603-RES]  163.83,75.69 270 top
R66  10K  [0603-RES]  189.48,81.03 180 top
R67  10K  [0603-RES]  193.04,81.03 0 top
R68  200k  [0603-RES]  188.47,78.74 90 top
R69  DNP  [0603-RES]  193.29,75.69 270 top
R70  DNP  [0603-RES]  194.82,75.69 270 top
R71  10K  [0603-RES]  220.47,81.03 180 top
R72  10K  [0603-RES]  224.03,81.03 0 top
R73  200k  [0603-RES]  219.46,78.74 90 top
R74  DNP  [0603-RES]  224.28,75.69 270 top
R75  DNP  [0603-RES]  225.81,75.69 270 top
R76  10K  [0603-RES]  251.46,81.03 180 top
R77  10K  [0603-RES]  255.02,81.03 0 top
R78  200k  [0603-RES]  250.44,78.74 90 top
R79  DNP  [0603-RES]  255.27,75.69 270 top
R80  DNP  [0603-RES]  256.79,75.69 270 top
R81  10K  [0603-RES]  20.83,139.7 180 top
R82  10K  [0603-RES]  24.38,139.7 0 top
R83  200k  [0603-RES]  19.81,137.41 90 top
R84  DNP  [0603-RES]  24.64,134.37 270 top
R85  DNP  [0603-RES]  26.16,134.37 270 top
R86  10K  [0603-RES]  51.82,139.7 180 top
R87  10K  [0603-RES]  55.37,139.7 0 top
R88  200k  [0603-RES]  50.8,137.41 90 top
R89  DNP  [0603-RES]  55.63,134.37 270 top
R90  DNP  [0603-RES]  57.15,134.37 270 top
R91  10K  [0603-RES]  82.8,139.7 180 top
R92  10K  [0603-RES]  86.36,139.7 0 top
R93  200k  [0603-RES]  81.79,137.41 90 top
R94  DNP  [0603-RES]  86.61,134.37 270 top
R95  DNP  [0603-RES]  88.14,134.37 270 top
R96  10K  [0603-RES]  113.79,139.7 180 top
R97  10K  [0603-RES]  117.35,139.7 0 top
R98  200k  [0603-RES]  112.78,137.41 90 top
R99  DNP  [0603-RES]  117.6,134.37 270 top
R100  DNP  [0603-RES]  119.13,134.37 270 top
R101  10K  [0603-RES]  20.83,184.66 180 top
R102  10K  [0603-RES]  24.38,184.66 0 top
R103  200k  [0603-RES]  19.81,182.37 90 top
R104  DNP  [0603-RES]  24.64,179.32 270 top
R105  DNP  [0603-RES]  26.16,179.32 270 top
R106  10K  [0603-RES]  51.82,184.66 180 top
R107  10K  [0603-RES]  55.37,184.66 0 top
R108  200k  [0603-RES]  50.8,182.37 90 top
R109  DNP  [0603-RES]  55.63,179.32 270 top
R110  DNP  [0603-RES]  57.15,179.32 270 top
R111  10K  [0603-RES]  82.8,184.66 180 top
R112  10K  [0603-RES]  86.36,184.66 0 top
R113  200k  [0603-RES]  81.79,182.37 90 top
R114  DNP  [0603-RES]  86.61,179.32 270 top
R115  DNP  [0603-RES]  88.14,179.32 270 top
R116  10K  [0603-RES]  113.79,184.66 180 top
R117  10K  [0603-RES]  117.35,184.66 0 top
R118  200k  [0603-RES]  112.78,182.37 90 top
R119  DNP  [0603-RES]  117.6,179.32 270 top
R120  DNP  [0603-RES]  119.13,179.32 270 top
R121  10K  [0603-RES]  158.5,139.7 180 top
R122  10K  [0603-RES]  162.05,139.7 0 top
R123  200k  [0603-RES]  157.48,137.41 90 top
R124  DNP  [0603-RES]  162.31,134.37 270 top
R125  DNP  [0603-RES]  163.83,134.37 270 top
R126  10K  [0603-RES]  189.48,139.7 180 top
R127  10K  [0603-RES]  193.04,139.7 0 top
R128  200k  [0603-RES]  188.47,137.41 90 top
R129  DNP  [0603-RES]  193.29,134.37 270 top
R130  DNP  [0603-RES]  194.82,134.37 270 top
R131  10K  [0603-RES]  220.47,139.7 180 top
R132  10K  [0603-RES]  224.03,139.7 0 top
R133  200k  [0603-RES]  219.46,137.41 90 top
R134  DNP  [0603-RES]  224.28,134.37 270 top
R135  DNP  [0603-RES]  225.81,134.37 270 top
R136  10K  [0603-RES]  251.46,139.7 180 top
R137  10K  [0603-RES]  255.02,139.7 0 top
R138  200k  [0603-RES]  250.44,137.41 90 top
R139  DNP  [0603-RES]  255.27,134.37 270 top
R140  DNP  [0603-RES]  256.79,134.37 270 top
R141  10K  [0603-RES]  158.5,184.66 180 top
R142  10K  [0603-RES]  162.05,184.66 0 top
R143  200k  [0603-RES]  157.48,182.37 90 top
R144  DNP  [0603-RES]  162.31,179.32 270 top
R145  DNP  [0603-RES]  163.83,179.32 270 top
R146  10K  [0603-RES]  189.48,184.66 180 top
R147  10K  [0603-RES]  193.04,184.66 0 top
R148  200k  [0603-RES]  188.47,182.37 90 top
R149  DNP  [0603-RES]  193.29,179.32 270 top
R150  DNP  [0603-RES]  194.82,179.32 270 top
R151  10K  [0603-RES]  220.47,184.66 180 top
R152  10K  [0603-RES]  224.03,184.66 0 top
R153  200k  [0603-RES]  219.46,182.37 90 top
R154  DNP  [0603-RES]  224.28,179.32 270 top
R155  DNP  [0603-RES]  225.81,179.32 270 top
R156  10K  [0603-RES]  251.46,184.66 180 top
R157  10K  [0603-RES]  255.02,184.66 0 top
R158  200k  [0603-RES]  250.44,182.37 90 top
R159  DNP  [0603-RES]  255.27,179.32 270 top
R160  DNP  [0603-RES]  256.79,179.32 270 top
SJ1  Power Select  [PAD-JUMPER-3-2OF3_NC_BY_TRACE_YES_SILK_FULL_BOX]  19.05,29.97 180 top
SJ2  Power Select  [PAD-JUMPER-3-2OF3_NC_BY_TRACE_YES_SILK_FULL_BOX]  50.04,29.97 180 top
SJ3  Power Select  [PAD-JUMPER-3-2OF3_NC_BY_TRACE_YES_SILK_FULL_BOX]  81.03,29.97 180 top
SJ4  Power Select  [PAD-JUMPER-3-2OF3_NC_BY_TRACE_YES_SILK_FULL_BOX]  112.01,29.97 180 top
SJ5  Power Select  [PAD-JUMPER-3-2OF3_NC_BY_TRACE_YES_SILK_FULL_BOX]  19.05,74.93 180 top
SJ6  Power Select  [PAD-JUMPER-3-2OF3_NC_BY_TRACE_YES_SILK_FULL_BOX]  50.04,74.93 180 top
SJ7  Power Select  [PAD-JUMPER-3-2OF3_NC_BY_TRACE_YES_SILK_FULL_BOX]  81.03,74.93 180 top
SJ8  Power Select  [PAD-JUMPER-3-2OF3_NC_BY_TRACE_YES_SILK_FULL_BOX]  112.01,74.93 180 top
SJ9  Power Select  [PAD-JUMPER-3-2OF3_NC_BY_TRACE_YES_SILK_FULL_BOX]  156.72,29.97 180 top
SJ10  Power Select  [PAD-JUMPER-3-2OF3_NC_BY_TRACE_YES_SILK_FULL_BOX]  187.71,29.97 180 top
SJ11  Power Select  [PAD-JUMPER-3-2OF3_NC_BY_TRACE_YES_SILK_FULL_BOX]  218.69,29.97 180 top
SJ12  Power Select  [PAD-JUMPER-3-2OF3_NC_BY_TRACE_YES_SILK_FULL_BOX]  249.68,29.97 180 top
SJ13  Power Select  [PAD-JUMPER-3-2OF3_NC_BY_TRACE_YES_SILK_FULL_BOX]  156.72,74.93 180 top
SJ14  Power Select  [PAD-JUMPER-3-2OF3_NC_BY_TRACE_YES_SILK_FULL_BOX]  187.71,74.93 180 top
SJ15  Power Select  [PAD-JUMPER-3-2OF3_NC_BY_TRACE_YES_SILK_FULL_BOX]  218.69,74.93 180 top
SJ16  Power Select  [PAD-JUMPER-3-2OF3_NC_BY_TRACE_YES_SILK_FULL_BOX]  249.68,74.93 180 top
SJ17  Power Select  [PAD-JUMPER-3-2OF3_NC_BY_TRACE_YES_SILK_FULL_BOX]  19.05,133.6 180 top
SJ18  Power Select  [PAD-JUMPER-3-2OF3_NC_BY_TRACE_YES_SILK_FULL_BOX]  50.04,133.6 180 top
SJ19  Power Select  [PAD-JUMPER-3-2OF3_NC_BY_TRACE_YES_SILK_FULL_BOX]  81.03,133.6 180 top
SJ20  Power Select  [PAD-JUMPER-3-2OF3_NC_BY_TRACE_YES_SILK_FULL_BOX]  112.01,133.6 180 top
SJ21  Power Select  [PAD-JUMPER-3-2OF3_NC_BY_TRACE_YES_SILK_FULL_BOX]  19.05,178.56 180 top
SJ22  Power Select  [PAD-JUMPER-3-2OF3_NC_BY_TRACE_YES_SILK_FULL_BOX]  50.04,178.56 180 top
SJ23  Power Select  [PAD-JUMPER-3-2OF3_NC_BY_TRACE_YES_SILK_FULL_BOX]  81.03,178.56 180 top
SJ24  Power Select  [PAD-JUMPER-3-2OF3_NC_BY_TRACE_YES_SILK_FULL_BOX]  112.01,178.56 180 top
SJ25  Power Select  [PAD-JUMPER-3-2OF3_NC_BY_TRACE_YES_SILK_FULL_BOX]  156.72,133.6 180 top
SJ26  Power Select  [PAD-JUMPER-3-2OF3_NC_BY_TRACE_YES_SILK_FULL_BOX]  187.71,133.6 180 top
SJ27  Power Select  [PAD-JUMPER-3-2OF3_NC_BY_TRACE_YES_SILK_FULL_BOX]  218.69,133.6 180 top
SJ28  Power Select  [PAD-JUMPER-3-2OF3_NC_BY_TRACE_YES_SILK_FULL_BOX]  249.68,133.6 180 top
SJ29  Power Select  [PAD-JUMPER-3-2OF3_NC_BY_TRACE_YES_SILK_FULL_BOX]  156.72,178.56 180 top
SJ30  Power Select  [PAD-JUMPER-3-2OF3_NC_BY_TRACE_YES_SILK_FULL_BOX]  187.71,178.56 180 top
SJ31  Power Select  [PAD-JUMPER-3-2OF3_NC_BY_TRACE_YES_SILK_FULL_BOX]  218.69,178.56 180 top
SJ32  Power Select  [PAD-JUMPER-3-2OF3_NC_BY_TRACE_YES_SILK_FULL_BOX]  249.68,178.56 180 top
U1  MIC5205  [SOT23-5]  19.05,26.42 0 top
U2  PCA9306  [PCA9306DC-1:1]  22.61,33.78 90 top
U3  PCA9306  [PCA9306DC-1:1]  53.59,33.78 90 top
U4  MIC5205  [SOT23-5]  50.04,26.42 0 top
U5  PCA9306  [PCA9306DC-1:1]  84.58,33.78 90 top
U6  MIC5205  [SOT23-5]  81.03,26.42 0 top
U7  PCA9306  [PCA9306DC-1:1]  115.57,33.78 90 top
U8  MIC5205  [SOT23-5]  112.01,26.42 0 top
U9  PCA9306  [PCA9306DC-1:1]  22.61,78.74 90 top
U10  MIC5205  [SOT23-5]  19.05,71.37 0 top
U11  PCA9306  [PCA9306DC-1:1]  53.59,78.74 90 top
U12  MIC5205  [SOT23-5]  50.04,71.37 0 top
U13  PCA9306  [PCA9306DC-1:1]  84.58,78.74 90 top
U14  MIC5205  [SOT23-5]  81.03,71.37 0 top
U15  PCA9306  [PCA9306DC-1:1]  115.57,78.74 90 top
U16  MIC5205  [SOT23-5]  112.01,71.37 0 top
U17  PCA9306  [PCA9306DC-1:1]  160.27,33.78 90 top
U18  MIC5205  [SOT23-5]  156.72,26.42 0 top
U19  PCA9306  [PCA9306DC-1:1]  191.26,33.78 90 top
U20  MIC5205  [SOT23-5]  187.71,26.42 0 top
U21  PCA9306  [PCA9306DC-1:1]  222.25,33.78 90 top
U22  MIC5205  [SOT23-5]  218.69,26.42 0 top
U23  PCA9306  [PCA9306DC-1:1]  253.24,33.78 90 top
U24  MIC5205  [SOT23-5]  249.68,26.42 0 top
U25  PCA9306  [PCA9306DC-1:1]  160.27,78.74 90 top
U26  MIC5205  [SOT23-5]  156.72,71.37 0 top
U27  PCA9306  [PCA9306DC-1:1]  191.26,78.74 90 top
U28  MIC5205  [SOT23-5]  187.71,71.37 0 top
U29  PCA9306  [PCA9306DC-1:1]  222.25,78.74 90 top
U30  MIC5205  [SOT23-5]  218.69,71.37 0 top
U31  PCA9306  [PCA9306DC-1:1]  253.24,78.74 90 top
U32  MIC5205  [SOT23-5]  249.68,71.37 0 top
U33  PCA9306  [PCA9306DC-1:1]  22.61,137.41 90 top
U34  MIC5205  [SOT23-5]  19.05,130.05 0 top
U35  PCA9306  [PCA9306DC-1:1]  53.59,137.41 90 top
U36  MIC5205  [SOT23-5]  50.04,130.05 0 top
U37  PCA9306  [PCA9306DC-1:1]  84.58,137.41 90 top
U38  MIC5205  [SOT23-5]  81.03,130.05 0 top
U39  PCA9306  [PCA9306DC-1:1]  115.57,137.41 90 top
U40  MIC5205  [SOT23-5]  112.01,130.05 0 top
U41  PCA9306  [PCA9306DC-1:1]  22.61,182.37 90 top
U42  MIC5205  [SOT23-5]  19.05,175.01 0 top
U43  PCA9306  [PCA9306DC-1:1]  53.59,182.37 90 top
U44  MIC5205  [SOT23-5]  50.04,175.01 0 top
U45  PCA9306  [PCA9306DC-1:1]  84.58,182.37 90 top
U46  MIC5205  [SOT23-5]  81.03,175.01 0 top
U47  PCA9306  [PCA9306DC-1:1]  115.57,182.37 90 top
U48  MIC5205  [SOT23-5]  112.01,175.01 0 top
U49  PCA9306  [PCA9306DC-1:1]  160.27,137.41 90 top
U50  MIC5205  [SOT23-5]  156.72,130.05 0 top
U51  PCA9306  [PCA9306DC-1:1]  191.26,137.41 90 top
U52  MIC5205  [SOT23-5]  187.71,130.05 0 top
U53  PCA9306  [PCA9306DC-1:1]  222.25,137.41 90 top
U54  MIC5205  [SOT23-5]  218.69,130.05 0 top
U55  PCA9306  [PCA9306DC-1:1]  253.24,137.41 90 top
U56  MIC5205  [SOT23-5]  249.68,130.05 0 top
U57  PCA9306  [PCA9306DC-1:1]  160.27,182.37 90 top
U58  MIC5205  [SOT23-5]  156.72,175.01 0 top
U59  PCA9306  [PCA9306DC-1:1]  191.26,182.37 90 top
U60  MIC5205  [SOT23-5]  187.71,175.01 0 top
U61  PCA9306  [PCA9306DC-1:1]  222.25,182.37 90 top
U62  MIC5205  [SOT23-5]  218.69,175.01 0 top
U63  PCA9306  [PCA9306DC-1:1]  253.24,182.37 90 top
U64  MIC5205  [SOT23-5]  249.68,175.01 0 top
U$1  EDISON_CONNECTOR_FULLMOUNTING_HOLES  [EDISON_DAUGHTER]  65.79,10.67 0 bottom
U$2  EDISON_CONNECTOR_FULLMOUNTING_HOLES  [EDISON_DAUGHTER]  34.8,10.67 0 bottom
U$3  EDISON_CONNECTOR_FULLHEADER  [DF40C-70DP-0.4(51)]  31.5,23.04 90 bottom
U$4  EDISON_CONNECTOR_FULLHEADER  [DF40C-70DP-0.4(51)]  62.49,23.04 90 bottom
U$5  EDISON_CONNECTOR_FULLMOUNTING_HOLES  [EDISON_DAUGHTER]  96.77,10.67 0 bottom
U$6  EDISON_CONNECTOR_FULLHEADER  [DF40C-70DP-0.4(51)]  93.47,23.04 90 bottom
U$7  EDISON_CONNECTOR_FULLMOUNTING_HOLES  [EDISON_DAUGHTER]  127.76,10.67 0 bottom
U$8  EDISON_CONNECTOR_FULLHEADER  [DF40C-70DP-0.4(51)]  124.46,23.04 90 bottom
U$9  EDISON_CONNECTOR_FULLMOUNTING_HOLES  [EDISON_DAUGHTER]  34.8,55.63 0 bottom
U$10  EDISON_CONNECTOR_FULLHEADER  [DF40C-70DP-0.4(51)]  31.5,68 90 bottom
U$11  EDISON_CONNECTOR_FULLMOUNTING_HOLES  [EDISON_DAUGHTER]  65.79,55.63 0 bottom
U$12  EDISON_CONNECTOR_FULLHEADER  [DF40C-70DP-0.4(51)]  62.49,68 90 bottom
U$13  EDISON_CONNECTOR_FULLMOUNTING_HOLES  [EDISON_DAUGHTER]  96.77,55.63 0 bottom
U$14  EDISON_CONNECTOR_FULLHEADER  [DF40C-70DP-0.4(51)]  93.47,68 90 bottom
U$15  EDISON_CONNECTOR_FULLMOUNTING_HOLES  [EDISON_DAUGHTER]  127.76,55.63 0 bottom
U$16  EDISON_CONNECTOR_FULLHEADER  [DF40C-70DP-0.4(51)]  124.46,68 90 bottom
U$17  EDISON_CONNECTOR_FULLMOUNTING_HOLES  [EDISON_DAUGHTER]  172.47,10.67 0 bottom
U$18  EDISON_CONNECTOR_FULLHEADER  [DF40C-70DP-0.4(51)]  169.17,23.04 90 bottom
U$19  EDISON_CONNECTOR_FULLMOUNTING_HOLES  [EDISON_DAUGHTER]  203.45,10.67 0 bottom
U$20  EDISON_CONNECTOR_FULLHEADER  [DF40C-70DP-0.4(51)]  200.15,23.04 90 bottom
U$21  EDISON_CONNECTOR_FULLMOUNTING_HOLES  [EDISON_DAUGHTER]  234.44,10.67 0 bottom
U$22  EDISON_CONNECTOR_FULLHEADER  [DF40C-70DP-0.4(51)]  231.14,23.04 90 bottom
U$23  EDISON_CONNECTOR_FULLMOUNTING_HOLES  [EDISON_DAUGHTER]  265.43,10.67 0 bottom
U$24  EDISON_CONNECTOR_FULLHEADER  [DF40C-70DP-0.4(51)]  262.13,23.04 90 bottom
U$25  EDISON_CONNECTOR_FULLMOUNTING_HOLES  [EDISON_DAUGHTER]  172.47,55.63 0 bottom
U$26  EDISON_CONNECTOR_FULLHEADER  [DF40C-70DP-0.4(51)]  169.17,68 90 bottom
U$27  EDISON_CONNECTOR_FULLMOUNTING_HOLES  [EDISON_DAUGHTER]  203.45,55.63 0 bottom
U$28  EDISON_CONNECTOR_FULLHEADER  [DF40C-70DP-0.4(51)]  200.15,68 90 bottom
U$29  EDISON_CONNECTOR_FULLMOUNTING_HOLES  [EDISON_DAUGHTER]  234.44,55.63 0 bottom
U$30  EDISON_CONNECTOR_FULLHEADER  [DF40C-70DP-0.4(51)]  231.14,68 90 bottom
U$31  EDISON_CONNECTOR_FULLMOUNTING_HOLES  [EDISON_DAUGHTER]  265.43,55.63 0 bottom
U$32  EDISON_CONNECTOR_FULLHEADER  [DF40C-70DP-0.4(51)]  262.13,68 90 bottom
U$33  EDISON_CONNECTOR_FULLMOUNTING_HOLES  [EDISON_DAUGHTER]  34.8,114.3 0 bottom
U$34  EDISON_CONNECTOR_FULLHEADER  [DF40C-70DP-0.4(51)]  31.5,126.67 90 bottom
U$35  EDISON_CONNECTOR_FULLMOUNTING_HOLES  [EDISON_DAUGHTER]  65.79,114.3 0 bottom
U$36  EDISON_CONNECTOR_FULLHEADER  [DF40C-70DP-0.4(51)]  62.49,126.67 90 bottom
U$37  EDISON_CONNECTOR_FULLMOUNTING_HOLES  [EDISON_DAUGHTER]  96.77,114.3 0 bottom
U$38  EDISON_CONNECTOR_FULLHEADER  [DF40C-70DP-0.4(51)]  93.47,126.67 90 bottom
U$39  EDISON_CONNECTOR_FULLMOUNTING_HOLES  [EDISON_DAUGHTER]  127.76,114.3 0 bottom
U$40  EDISON_CONNECTOR_FULLHEADER  [DF40C-70DP-0.4(51)]  124.46,126.67 90 bottom
U$41  EDISON_CONNECTOR_FULLMOUNTING_HOLES  [EDISON_DAUGHTER]  34.8,159.26 0 bottom
U$42  EDISON_CONNECTOR_FULLHEADER  [DF40C-70DP-0.4(51)]  31.5,171.63 90 bottom
U$43  EDISON_CONNECTOR_FULLMOUNTING_HOLES  [EDISON_DAUGHTER]  65.79,159.26 0 bottom
U$44  EDISON_CONNECTOR_FULLHEADER  [DF40C-70DP-0.4(51)]  62.49,171.63 90 bottom
U$45  EDISON_CONNECTOR_FULLMOUNTING_HOLES  [EDISON_DAUGHTER]  96.77,159.26 0 bottom
U$46  EDISON_CONNECTOR_FULLHEADER  [DF40C-70DP-0.4(51)]  93.47,171.63 90 bottom
U$47  EDISON_CONNECTOR_FULLMOUNTING_HOLES  [EDISON_DAUGHTER]  127.76,159.26 0 bottom
U$48  EDISON_CONNECTOR_FULLHEADER  [DF40C-70DP-0.4(51)]  124.46,171.63 90 bottom
U$49  EDISON_CONNECTOR_FULLMOUNTING_HOLES  [EDISON_DAUGHTER]  172.47,114.3 0 bottom
U$50  EDISON_CONNECTOR_FULLHEADER  [DF40C-70DP-0.4(51)]  169.17,126.67 90 bottom
U$51  EDISON_CONNECTOR_FULLMOUNTING_HOLES  [EDISON_DAUGHTER]  203.45,114.3 0 bottom
U$52  EDISON_CONNECTOR_FULLHEADER  [DF40C-70DP-0.4(51)]  200.15,126.67 90 bottom
U$53  EDISON_CONNECTOR_FULLMOUNTING_HOLES  [EDISON_DAUGHTER]  234.44,114.3 0 bottom
U$54  EDISON_CONNECTOR_FULLHEADER  [DF40C-70DP-0.4(51)]  231.14,126.67 90 bottom
U$55  EDISON_CONNECTOR_FULLMOUNTING_HOLES  [EDISON_DAUGHTER]  265.43,114.3 0 bottom
U$56  EDISON_CONNECTOR_FULLHEADER  [DF40C-70DP-0.4(51)]  262.13,126.67 90 bottom
U$57  EDISON_CONNECTOR_FULLMOUNTING_HOLES  [EDISON_DAUGHTER]  172.47,159.26 0 bottom
U$58  EDISON_CONNECTOR_FULLHEADER  [DF40C-70DP-0.4(51)]  169.17,171.63 90 bottom
U$59  EDISON_CONNECTOR_FULLMOUNTING_HOLES  [EDISON_DAUGHTER]  203.45,159.26 0 bottom
U$60  EDISON_CONNECTOR_FULLHEADER  [DF40C-70DP-0.4(51)]  200.15,171.63 90 bottom
U$61  EDISON_CONNECTOR_FULLMOUNTING_HOLES  [EDISON_DAUGHTER]  234.44,159.26 0 bottom
U$62  EDISON_CONNECTOR_FULLHEADER  [DF40C-70DP-0.4(51)]  231.14,171.63 90 bottom
U$63  EDISON_CONNECTOR_FULLMOUNTING_HOLES  [EDISON_DAUGHTER]  265.43,159.26 0 bottom
U$64  EDISON_CONNECTOR_FULLHEADER  [DF40C-70DP-0.4(51)]  262.13,171.63 90 bottom